# Altium PCB PCB.PcbDoc
Units mm, origin at the board's own origin, x right, y up, seen from the top; angles counter-clockwise.
Board outline 48.39 x 30.73 mm, 2 copper layers (Top Layer, Bottom Layer); 8 components, 8 nets, 46 pads, 2 vias.
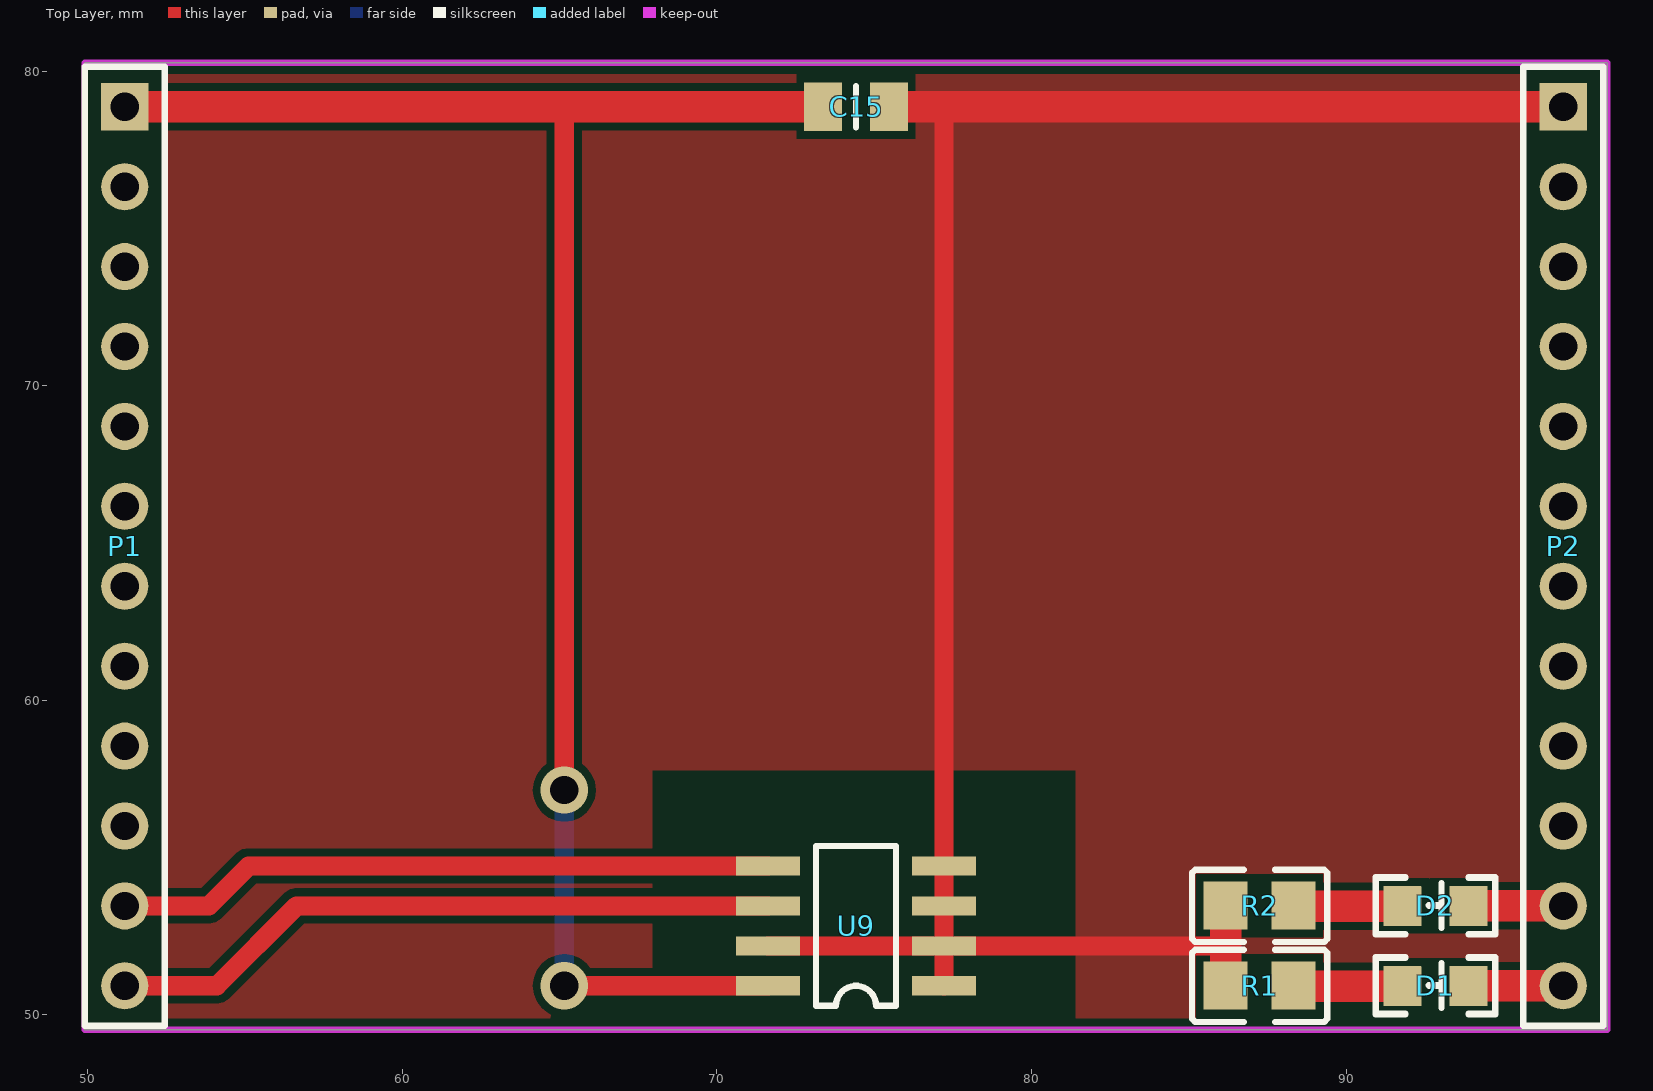
[diagram p0: Top Layer view]
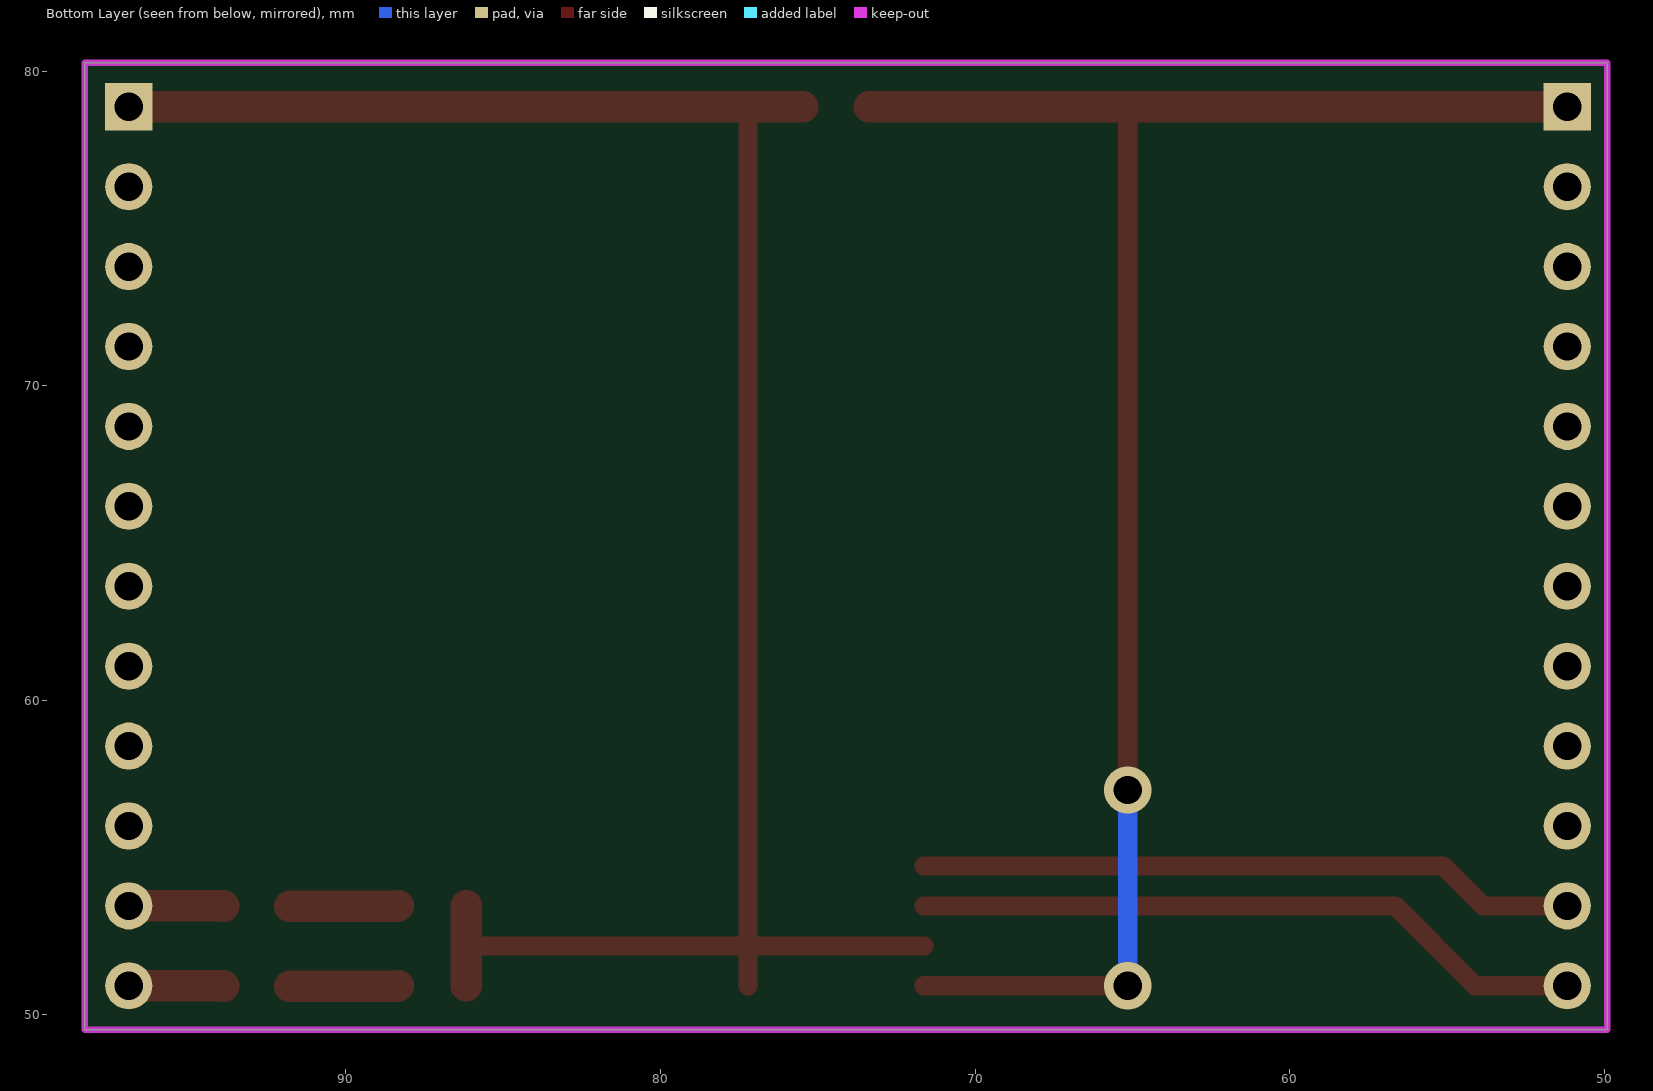
[diagram p1: Bottom Layer view, seen from below]

## Layer stack, top to bottom
Top Layer: signal copper 0.0356
Dielectric: dielectric 0.32, FR-4, Dk 4.8
Bottom Layer: signal copper 0.0356

## Board outline
49.911,49.53 49.911,80.264 98.298,80.264 98.298,49.53

## Design rules (kind name [scope] priority, off if disabled: settings)
Clearance [All] p1: gap=0.254
PolygonConnect [All] p1: connectstyle=Relief reliefconductorwidth=0.254 reliefentries=4 polygonreliefangle="90 Angle" airgapwidth=0.254
RoutingVias [All] p1: holewidth=0.711 width=1.27 viastyle="Through Hole" minholewidth=0.711 minwidth=1.27 maxholewidth=0.711 maxwidth=1.27
SolderMaskExpansion [All] p1: expansion=0.102
Width [All] p1: maxlimit=2 minlimit=0.254 preferedwidth=1
28 further rules are at their usual default settings.

## Components (designator, comment, footprint, x,y, rotation, side; value= is the part's Value field where it differs from the comment)
C15 "100nF" RESC2012X65M 73.373,78.867 r0 top
D1 "LED3" "Led 0805" 92.837,50.937 r180 top
D2 "LED3" "Led 0805" 92.837,53.477 r180 top
P1 "Header 12" HDR1X12 51.181,78.867 r270 top
P2 "Header 12" HDR1X12 96.901,78.867 r270 top
R1 "1K" 0805 87.249,50.935 r0 top
R2 "1K" 0805 87.249,53.475 r0 top
U9 "24C01" SO-8 71.629,54.737 r270 top

## Footprints (in the part's own frame and the unit in brackets; to place one, negate y for a bottom-side part, rotate by r counter-clockwise, add the part's x,y. Pads: shape width x height; smd on the part's side, far side on the other; paste and mask are expansions set on the pad)
0805 [mil]
  rect 55x60 smd: 1(-42.5,0) 2(42.5,0)
  silkscreen extent -84,-46 85,45
HDR1X12 [mm] "Connector; Header; 12 Position"
  rect 1.5x1.5 hole 0.9: 1(0,0)
  round 1.5 hole 0.9: 2(2.54,0) 3(5.08,0) 4(7.62,0) 5(10.16,0) 6(12.7,0) 7(15.24,0) 8(17.78,0) 9(20.32,0) 10(22.86,0) 11(25.4,0) 12(27.94,0)
  silkscreen extent -1.27,-1.27 29.21,1.27
"Led 0805" [mm]
  rect 1.2x1.25 smd: 1(-1.052,0.02) 1(-1.05,0) 2(1.048,0.02) 2(1.05,0)
  silkscreen extent -1.9,-0.9 1.9,0.92, body extent -1.04,-0.64 1,0.65, height 1.1
RESC2012X65M [mm]
  rect 1.2x1.55 smd: 1(0,0) 2(2.1,0)
  silkscreen extent 1.05,-0.65 1.05,0.65, body extent 0.05,-0.62 2.05,0.63, height 0.78
SO-8 [mil]
  rect 24x80 smd: 1(150,220) 2(100,220) 3(50,220) 4(0,220) 5(0,0) 6(50,0) 7(100,0) 8(150,0)
  silkscreen extent -25,60 175,160, body extent -21,-10 172,226, height 63

## Part data
C15: library part CAP, "Capacitor"
D1 D2: "Typical BLUE SiC LED"
P1 P2: "Header, 12-Pin"
R1 R2: library part Res2, "Resistor"

## Via types
v1: diameter 1.5, hole 0.9, Top Layer to Bottom Layer, 2 vias

## Nets (pads, with @x,y where several pads share a name; then routed paths per layer and width w, separated by ;. In a path a pad name is that pad's centre, name@x,y a point inside that pad or via, vN(x,y) a via of type N, cw(c..) or ccw(c..) an arc to the next point about the centre after c; other vN are vias at no path point)
+3V3: C15.1 P1.1 U9.8 | length 56.6
  Top Layer w0.61: v1(65.151,50.927) U9.8 ; v1(65.151,57.15) 65.151,78.867
  Top Layer w1: P1.1 65.151,78.867 C15.1
  Bottom Layer w0.61: v1(65.151,50.927) v1(65.151,57.15)
GND: C15.2 P2.1 R1.1 R2.1 U9.1 U9.2 U9.3 U9.4 U9.7 | length 66.6
  Top Layer w0.61: U9.7 U9.2 ; U9.1 U9.2 ; 77.343,78.867 77.217,78.741 U9.4 U9.3 U9.2 ; 86.169,52.324 86.042,52.197 U9.2
  Top Layer w1: C15.2 77.343,78.867 P2.1 ; R1.1 86.169,52.324 R2.1
NetD1_1: D1.1 P2.12 | length 3
  Top Layer w1: D1.1@93.889,50.917 93.899,50.927 P2.12
NetD1_2: D1.2 R1.2 | length 3.5
  Top Layer w1: R1.2 88.347,50.917 D1.2@91.789,50.917
NetD2_1: D2.1 P2.11 | length 3
  Top Layer w1: D2.1@93.889,53.457 93.899,53.467 P2.11
NetD2_2: D2.2 R2.2 | length 3.5
  Top Layer w1: R2.2 88.347,53.457 D2.2@91.789,53.457
SCL: P1.12 U9.6 | length 21.5
  Top Layer w0.61: P1.12 54.102,50.927 56.642,53.467 U9.6
SDA: P1.11 U9.5 | length 21
  Top Layer w0.61: P1.11 53.848,53.467 55.118,54.737 U9.5
pads on no net: P1.2 P1.3 P1.4 P1.5 P1.6 P1.7 P1.8 P1.9 P1.10 P2.2 P2.3 P2.4 P2.5 P2.6 P2.7 P2.8 P2.9 P2.10

## Polygon pours and split planes (outlines as drawn)
GND on Top Layer "Bottom Layer-No Net" (solid): 98.298,49.53 49.911,49.53 49.911,80.264 98.298,80.264 98.298,49.53

## Keep-outs
Keep-Out Layer:
  the board outline again, w0.2

## Other copper
Top Layer:
  pour cut-out: 92.643,52.578 93.035,52.578 93.035,54.356 92.641,54.356
  pour cut-out: 92.641,51.796 92.641,51.816 93.035,51.816 93.035,50.058 92.643,50.058
  pour cut-out: 87.376,51.951 85.471,51.951 85.471,49.891 87.376,49.891
  pour cut-out: 87.376,54.491 87.376,52.459 85.598,52.459 85.598,54.491
  pour cut-out: 72.519,79.896 72.519,77.838 76.327,77.838 76.327,79.896
  pour cut-out: 49.911,49.53 52.451,49.53 52.451,80.264 49.911,80.264
  pour cut-out: 98.298,49.53 95.631,49.53 95.631,80.264 98.298,80.264
  pour cut-out: 67.945,49.53 67.945,57.785 81.407,57.785 81.407,49.53